# Altium PCB LCD.PcbDoc
Units mm, origin at the board's own origin, x right, y up, seen from the top; angles counter-clockwise.
Board outline 150 x 37 mm, 2 copper layers (Top Layer, Bottom Layer); 62 components, 51 nets, 257 pads, 79 vias.
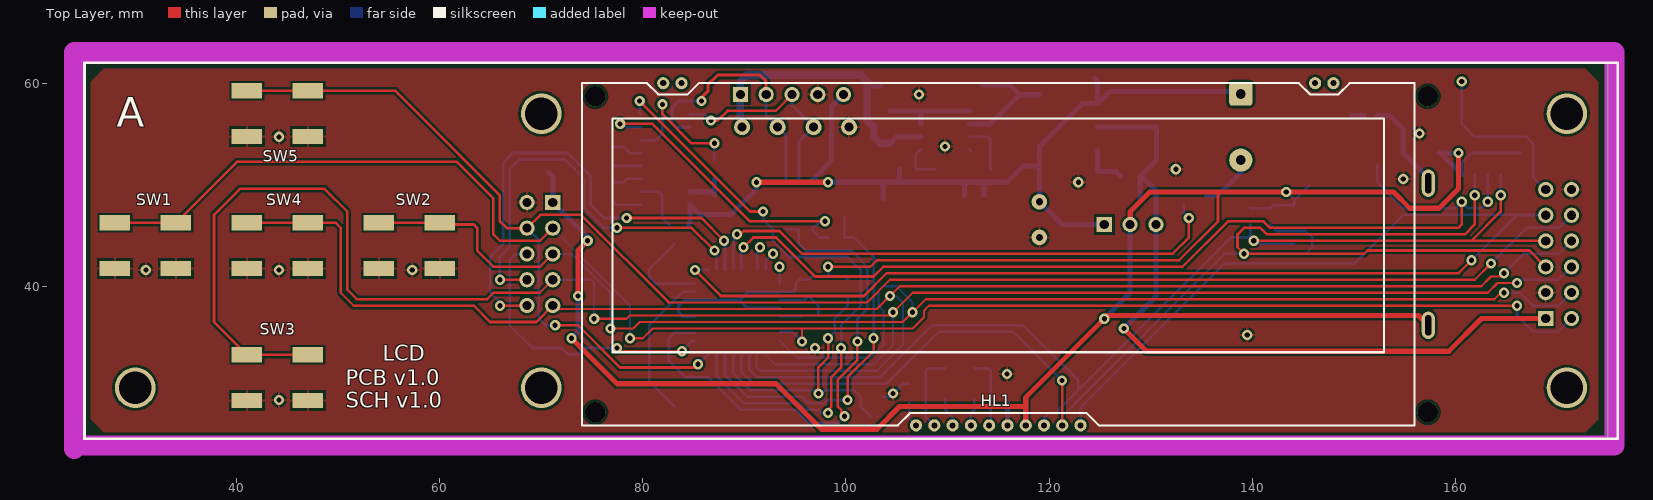
[diagram p0: Top Layer view]
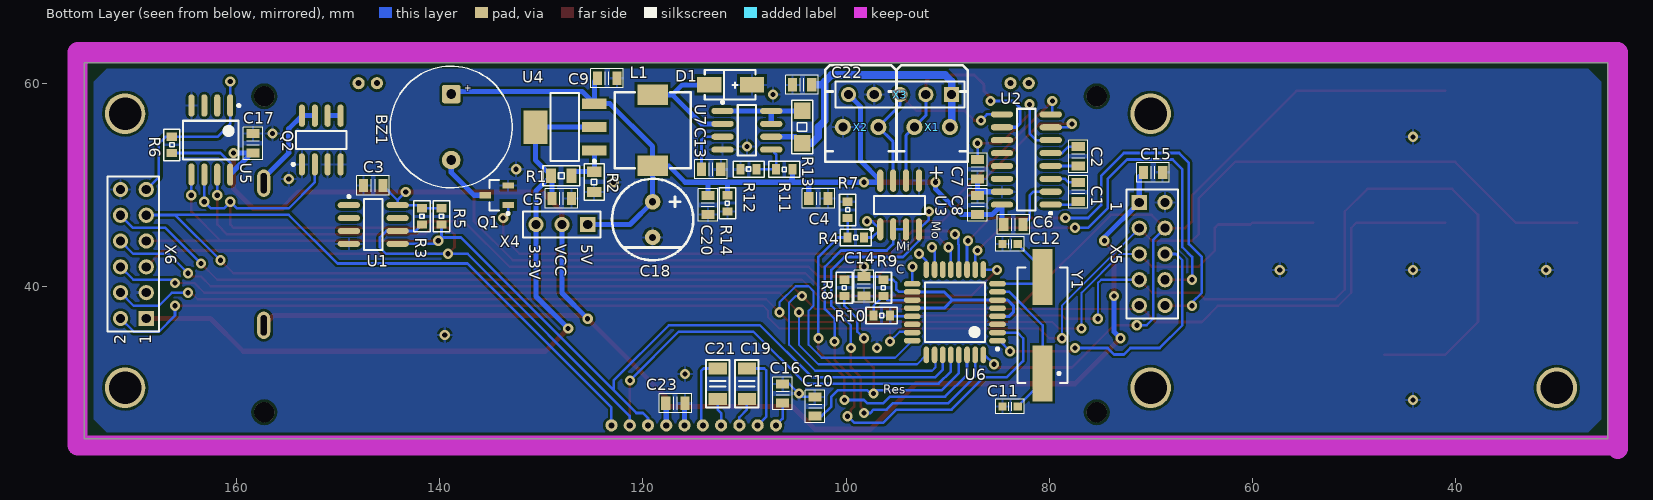
[diagram p1: Bottom Layer view, seen from below]
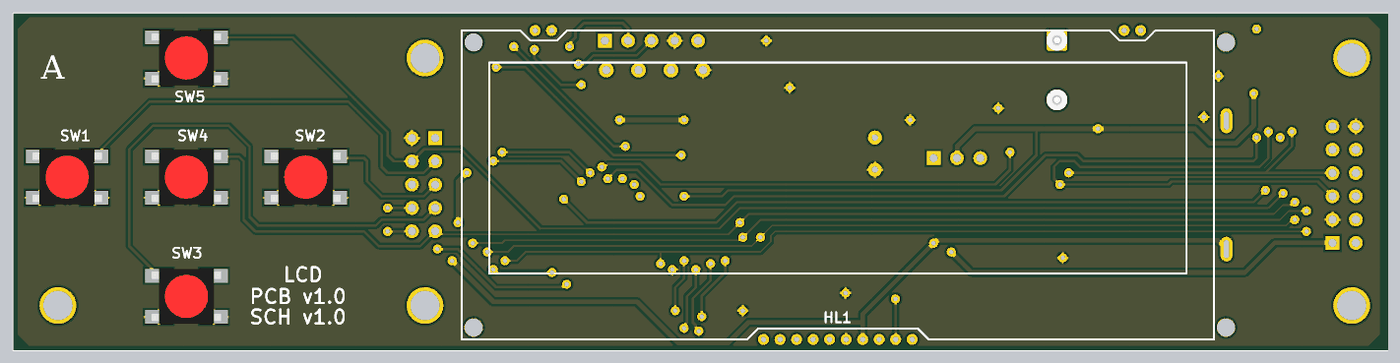
[diagram p2: 3D render of the assembled board from above, using the file's embedded part models]

## Layer stack, top to bottom
Top Solder: solder mask 0.0102, Solder Resist, Dk 3.5
Top Layer: signal copper 0.0356
Dielectric1: dielectric 0.32, FR-4, Dk 4.8
Bottom Layer: signal copper 0.0356
Bottom Solder: solder mask 0.0102, Solder Resist, Dk 3.5

## Board outline
25,25 25,62 175,62 175,25

## Design rules (kind name [scope] priority, off if disabled: settings)
Clearance [All] p1: gap=0.254
PolygonConnect [All] p1: connectstyle=Relief reliefconductorwidth=0.254 reliefentries=4 polygonreliefangle="90 Angle" airgapwidth=0.254
RoutingVias [All] p1: holewidth=0.5 width=1 viastyle="Through Hole" minholewidth=0.4 minwidth=9 maxholewidth=0.7 maxwidth=1.5
SilkToSolderMaskClearance SilkscreenOverComponentPads [IsPad] p1: minsilkscreentomaskgap=0.254 clearancetoexposedcopper=TRUE
SolderMaskExpansion [All] p1: expansion=0.102
Width [All] p1: maxlimit=1 minlimit=0.2 preferedwidth=0.254
29 further rules are at their usual default settings.

## Components (designator, comment, footprint, x,y, rotation, side; value= is the part's Value field where it differs from the comment)
BZ1 "Alternate part: 3100-932" BUZZER_12.0X8.5MM 138.88,55.68 r270 bottom
C1 "0.1u" C_0805 77.12,49.28 r270 bottom
C2 "0.1u" C_0805 77.12,52.8 r270 bottom
C3 "0.1u" C_0805 146.56,49.92 r180 bottom
C4 "1u" C_0805 102.72,48.64 r0 bottom
C5 "1u" C_0805 128,48.64 r0 bottom
C6 "0.1u" C_0805 83.52,46.08 r0 bottom
C7 "0.1u" C_0805 87.04,51.52 r90 bottom
C8 "0.1u" C_0805 87.04,48 r270 bottom
C9 "1u" C_0805 123.52,60.48 r0 bottom
C10 "0.1u" C_0805 103.04,28.16 r270 bottom
C11 "15p" C_0603 83.84,28.16 r180 bottom
C12 "15p" C_0603 83.84,44.16 r180 bottom
C13 "220p" C_0805 113.28,51.52 r0 bottom
C14 "0.1u" C_0805 98.24,40 r90 bottom
C15 "0.1u" C_0805 69.76,51.2 r0 bottom
C16 "0.33u" C_0805 106.24,29.44 r270 bottom
C17 "1u" C_0805 158.4,54.08 r90 bottom
C18 "Component_1" PCBComponent_1 119.04,48.32 r270 bottom
C19 "2.2" C_1206 109.76,30.4 r90 bottom
C20 "1u" C_0805 113.6,48 r90 bottom
C21 "2.2" C_1206 112.64,30.4 r90 bottom
C22 "1u" C_0805 104.32,59.84 r180 bottom
C23 "0.1u" C_0805 116.8,28.48 r0 bottom
D1 "SS14" DO-214AC 111.36,59.84 r180 bottom
HL1 "RX0032" RX0032 115,45 r0 top locked
L1 "330uH" CDRH74 119.04,55.36 r0 bottom
Q1 "PDTC114" SOT-23B_N 134.4,48.96 r0 bottom
Q2 "IRF7319" SO-8 151.68,54.4 r90 bottom
R1 "*" "Resistor 0805" 127.04,50.88 r0 bottom
R2 "240" "Resistor 0805" 124.8,49.28 r90 bottom
R3 "3k" "Resistor 0603" 141.76,46.08 r90 bottom
R4 "3k" "Resistor 0603" 99.84,44.8 r180 bottom
R5 "3k" "Resistor 0603" 139.84,46.08 r90 bottom
R6 "3k" "Resistor 0603" 166.4,54.72 r270 bottom
R7 "3k" "Resistor 0603" 99.84,48.32 r270 bottom
R8 "3k" "Resistor 0603" 100.16,39.04 r90 bottom
R9 "3k" "Resistor 0603" 96.32,39.04 r90 bottom
R10 "3k" "Resistor 0603" 95.68,37.12 r0 bottom
R11 "3k" "Resistor 0603" 105.28,51.52 r0 bottom
R12 "1k" "Resistor 0603" 110.4,51.52 r180 bottom
R13 "3k" "Resistor 1206" 104.32,54.08 r90 bottom
R14 "3k" "Resistor 0603" 111.68,47.36 r90 bottom
SW1 "LTL613" LTL613 31,44 r180 top locked
SW2 "LTL613" LTL613 57,44 r180 top locked
SW3 "LTL613" LTL613 44,31 r180 top locked
SW4 "LTL613" LTL613 44,44 r180 top locked
SW5 "LTL613" LTL613 44,57 r180 top locked
U1 "AT24HC02BN-SP25-B" 8S1_N 146.56,46.08 r180 bottom
U2 "MAX232AESE" NSO16_N 82.24,52.48 r0 bottom
U3 "MAX485CSA" NSO8_N 94.72,48 r90 bottom
U4 "LM1117MPX-3.3" MP04A_N 127.68,55.68 r0 bottom
U5 "ATtiny25-20SU" 8S2_N 162.56,54.4 r270 bottom
U6 "ATmega8A-AU" 32A_N 89.28,37.44 r0 bottom
U7 "MC34063AD" 751-02_N 109.76,55.36 r180 bottom
X1 "DG-2P-35" DG-2P-35 91.52,55.68 r0 bottom
X2 "DG-2P-35" DG-2P-35 98.56,55.68 r0 bottom
X3 "Header 5" HDR1X5 89.6,58.88 r0 bottom
X4 "Header 3" HDR1X3 125.44,46.08 r0 bottom
X5 "Header 5X2" HDR2X5 71.12,48.26 r270 bottom
X6 "Header 6X2" HDR2X6 168.91,36.83 r90 bottom
Y1 "HC49/4H_SMX" HC49/4H_SMX 80.64,36.16 r90 bottom

## Footprints (in the part's own frame and the unit in brackets; to place one, negate y for a bottom-side part, rotate by r counter-clockwise, add the part's x,y. Pads: shape width x height; smd on the part's side, far side on the other; paste and mask are expansions set on the pad)
8S1_N [mm] "SOIC, 8-Leads, Body 4.9x3.9mm, Pitch 1.27mm, IPC Medium Density"
  oval 2.2x0.6 smd: 1(-2.4,1.905) 2(-2.4,0.635) 3(-2.4,-0.635) 4(-2.4,-1.905) 5(2.4,-1.905) 6(2.4,-0.635) 7(2.4,0.635) 8(2.4,1.905)
  silkscreen extent -2.53,-2.5 0.9,2.88, body extent -2,-2.5 2,2.5, height 1.75
8S2_N [mm] "SOP, 8-Leads, Body 5.3x5.3mm, Pitch 1.27mm, IPC Medium Density"
  oval 2.2x0.6 smd: 1(-3.4,1.905) 2(-3.4,0.635) 3(-3.4,-0.635) 4(-3.4,-1.905) 5(3.4,-1.905) 6(3.4,-0.635) 7(3.4,0.635) 8(3.4,1.905)
  silkscreen extent -3.52,-2.75 1.9,2.88, body extent -2.73,-2.75 2.73,2.75, height 2.16
32A_N [mm] "Thin QFP, 32-Leads, Body 7x7mm, Pitch 0.8mm, IPC Medium Density"
  oval 1.65x0.55 smd: 1(-4.2,2.8) 2(-4.2,2) 3(-4.2,1.2) 4(-4.2,0.4) 5(-4.2,-0.4) 6(-4.2,-1.2) 7(-4.2,-2) 8(-4.2,-2.8) 17(4.2,-2.8) 18(4.2,-2) 19(4.2,-1.2) 20(4.2,-0.4) 21(4.2,0.4) 22(4.2,1.2) 23(4.2,2) 24(4.2,2.8)
  oval 0.55x1.65 smd: 9(-2.8,-4.2) 10(-2,-4.2) 11(-1.2,-4.2) 12(-0.4,-4.2) 13(0.4,-4.2) 14(1.2,-4.2) 15(2,-4.2) 16(2.8,-4.2) 25(2.8,4.2) 26(2,4.2) 27(1.2,4.2) 28(0.4,4.2) 29(-0.4,4.2) 30(-1.2,4.2) 31(-2,4.2) 32(-2.8,4.2)
  silkscreen extent -4.32,-2.95 2.95,3.75, body extent -3.5,-3.5 3.5,3.5, height 1.2
751-02_N [mm] "SOIC, 8-Leads, Body 4.9x3.9mm, Pitch 1.27mm, IPC Medium Density"
  oval 2.2x0.6 smd: 1(-2.4,1.905) 2(-2.4,0.635) 3(-2.4,-0.635) 4(-2.4,-1.905) 5(2.4,-1.905) 6(2.4,-0.635) 7(2.4,0.635) 8(2.4,1.905)
  silkscreen extent -2.53,-2.5 0.9,2.88, body extent -1.95,-2.45 1.95,2.45, height 1.75
BUZZER_12.0X8.5MM [mil]
  round 20 on Mech15: 0(0,0)
  rrect25% 72x72 / inner rrect25% 72x72 / far side rrect25% 90x90 hole 38: 1(-127.95,0)
  round 72 / inner round 72 / far side round 90 hole 38: 2(127.95,0)
  silkscreen extent -236,-236 236,236, body extent -246,-246 246,246, height 354
C_0603 [mm] "Chip Capacitor; Body 1.6 x 0.8 mm (LxW typ)"
  rect 0.8x0.8 smd: 1(-0.75,0) 2(0.75,0)
  silkscreen extent -1.4,-0.7 1.4,0.7, body extent -0.8,-0.4 0.8,0.4, height 0.3
C_0805 [mm] "Capacitor Pattern"
  rect 0.9x1.3 smd: 1(-0.95,0) 2(0.95,0)
  silkscreen extent -1.6,-0.95 1.6,0.95, body extent -1,-0.63 1,0.62, height 0.6
C_1206 [mm]
  rect 1.15x1.8 smd: 1(-1.5,0) 2(1.5,0)
  silkscreen extent -2.32,-1.15 2.33,1.15, body extent -1.6,-0.8 1.6,0.8, height 1
CDRH74 [mm]
  rect 3x2 smd: 1(0,3.5) 2(0,-3.5)
  silkscreen extent -3.75,-3.75 3.75,3.75, body extent -3.5,-3.52 3.5,3.53, height 4.5
DG-2P-35 [mm]
  round 1.6 hole 0.9: 1(-1.75,0) 2(1.75,0)
  silkscreen extent -3.5,-6.1 3.5,3.4
DO-214AC [mm]
  rect 2.4x1.55 smd: 1(2.1,0) 2(-2.1,0)
  silkscreen extent -2.55,-1.45 2.45,1.45, body extent -2.6,-1.3 2.6,1.3, height 2.39
HC49/4H_SMX [mm] "Surface Mount Quartz Crystal; Body 13.4 (inc. leads) x 4.9 mm (LxW max)"
  rect 5.5x2 smd: 1(-4.75,0) 2(4.75,0)
  silkscreen extent -5.7,-2.45 5.7,2.45
HDR1X3 [mm] "Connector; Header; 3 Position"
  rect 1.5x1.5 hole 0.9: 1(0,0)
  round 1.5 hole 0.9: 2(2.54,0) 3(5.08,0)
  silkscreen extent -1.27,-1.27 6.35,1.27
HDR1X5 [mm] "Connector; Header; 5 Position"
  rect 1.5x1.5 hole 0.9: 1(0,0)
  round 1.5 hole 0.9: 2(2.54,0) 3(5.08,0) 4(7.62,0) 5(10.16,0)
  silkscreen extent -1.27,-1.27 11.43,1.27
HDR2X5 [mm] "Connector; Header; 5x2 Position"
  rect 1.5x1.5 hole 0.9: 1(0,0)
  round 1.5 hole 0.9: 2(0,2.54) 3(2.54,0) 4(2.54,2.54) 5(5.08,0) 6(5.08,2.54) 7(7.62,0) 8(7.62,2.54) 9(10.16,0) 10(10.16,2.54)
  silkscreen extent -1.27,-1.27 11.43,3.81
HDR2X6 [mm] "Connector; Header; 6x2 Position"
  rect 1.5x1.5 hole 0.9: 1(0,0)
  round 1.5 hole 0.9: 2(0,2.54) 3(2.54,0) 4(2.54,2.54) 5(5.08,0) 6(5.08,2.54) 7(7.62,0) 8(7.62,2.54) 9(10.16,0) 10(10.16,2.54) 11(12.7,0) 12(12.7,2.54)
  silkscreen extent -1.27,-1.27 13.97,3.81
LTL613 [mm]
  rect 3x1.5 smd: 0(-3,-2.25) 0(3,-2.25) 1(-3,2.25) 1(3,2.25)
  body extent -4.04,-3 4.04,3, height 5
MP04A_N [mm] "SOT223, 4-Leads, Body 6.5x3.5mm, Pitch 2.3mm, Lead Span 7mm, IPC Medium Density"
  rect 2.4x1 smd: 1(-2.9,2.3) 2(-2.9,0) 3(-2.9,-2.3)
  rect 2.4x3.3 smd: 4(2.9,0)
  silkscreen extent -3.02,-3.35 1.4,3.47, body extent -1.85,-3.35 1.85,3.35, height 1.8
NSO8_N [mm] "SOIC, 8-Leads, Body 4.9x3.9mm, Pitch 1.27mm, IPC Medium Density"
  oval 2.2x0.6 smd: 1(-2.4,1.905) 2(-2.4,0.635) 3(-2.4,-0.635) 4(-2.4,-1.905) 5(2.4,-1.905) 6(2.4,-0.635) 7(2.4,0.635) 8(2.4,1.905)
  silkscreen extent -2.52,-2.5 0.9,2.88, body extent -2,-2.5 2,2.5, height 1.75
NSO16_N [mm] "SOIC, 16-Leads, Body 9.9x3.9mm, Pitch 1.27mm, IPC Medium Density"
  oval 2.2x0.6 smd: 1(-2.4,4.445) 2(-2.4,3.175) 3(-2.4,1.905) 4(-2.4,0.635) 5(-2.4,-0.635) 6(-2.4,-1.905) 7(-2.4,-3.175) 8(-2.4,-4.445) 9(2.4,-4.445) 10(2.4,-3.175) 11(2.4,-1.905) 12(2.4,-0.635) 13(2.4,0.635) 14(2.4,1.905) 15(2.4,3.175) 16(2.4,4.445)
  silkscreen extent -2.52,-5 0.9,5.42, body extent -2,-5 2,5, height 1.75
PCBComponent_1 [mil]
  round 60 hole 27.56: 1(0,0) 2(137.8,0)
  silkscreen extent -89,-158 227,158
"Resistor 0603" [mm]
  rect 0.8x1 smd: 1(0,0) 2(1.6,0)
  silkscreen extent -0.72,-0.8 2.35,0.8, body extent -0.03,-0.45 1.63,0.45, height 0.46
"Resistor 0805" [mm]
  rect 1x1.4 smd: 1(0,0) 2(2,0)
  silkscreen extent -0.8,-1 2.8,1, body extent -0.03,-0.65 2.02,0.65, height 0.41
"Resistor 1206" [mm]
  rect 1.6x1.6 smd: 1(0,0) 2(3.2,0)
  silkscreen extent -1.02,-1.02 4.23,1.02, body extent -0.03,-0.79 3.4,0.8, height 0.5
RX0032 [mm]
  round 1.2 hole 0.6: 1(-8.1,-18.7) 2(-6.3,-18.7) 3(-4.5,-18.7) 4(-2.7,-18.7) 5(-0.9,-18.7) 6(0.9,-18.7) 7(2.7,-18.7) 8(4.5,-18.7) 9(6.3,-18.7) 10(8.1,-18.7) 11(-33,15) 12(-31.2,15) 13(31.2,15) 14(33,15)
  oval 1.3x2.7 hole 0.6 slot 2 at 90 deg: 15(42.35,5.15) 16(42.35,-8.85)
  round 2 hole 2: M(-39.7,-17.4) M(42.3,-17.4) M(42.3,13.7)
  round 2 hole 2 unplated: M(-39.7,13.7)
  silkscreen extent -41,-18.7 41,15
SO-8 [mm] "SOIC, 8-Leads, Body 4.9x3.9mm, Pitch 1.27mm, IPC Medium Density"
  oval 2.2x0.6 smd: 1(-2.4,1.905) 2(-2.4,0.635) 3(-2.4,-0.635) 4(-2.4,-1.905) 5(2.4,-1.905) 6(2.4,-0.635) 7(2.4,0.635) 8(2.4,1.905)
  silkscreen extent -2.52,-2.5 0.9,2.88, body extent -3.17,-2.51 3.17,2.49, height 1.88
SOT-23B_N [mm] "SOT23, 3-Leads, Body 2.9x1.3mm, Pitch 0.95mm, Lead Span 2.4mm, IPC Medium Density"
  rect 1.15x0.6 smd: 1(-1.125,0.95) 2(-1.125,-0.95) 3(1.125,0)
  silkscreen extent -1.25,-1.5 0.7,1.92, body extent -0.7,-1.5 0.7,1.5, height 1.14

## Part data
BZ1: library part BZ_12x8.5x6.5_2kHz, "Speaker, Magnetic Transducer"
C1 C2 C3 C4 C5 C6 C7 C8 C9 C10 C13 C14 C15 C16 C17 C20 C22 C23: library part C0805, "Capacitor"
C11 C12: library part C0603, "Capacitor"
C19 C21: library part C1206, "Capacitor"
D1: library part DS_DO-214, "Schottky Diode"
L1: library part L_CDRH74, "Inductor"
Q1: library part QNPN, "NPN Bipolar Transistor"
Q2: "HEXFET Power MOSFET"
R1 R2 R3 R4 R5 R6 R7 R8 R9 R10 R11 R12 R13 R14: library part Resistor
SW1 SW2 SW3 SW4 SW5: library part Button_tact, "Tact button switch"
U1: "2Kbit (256 x 8), 2-wire Bus Serial Automotive EEPROM with 1/2 memory Write Protect, 2.5V, 8-Pin SOIC, Bulk"
U2: "+5V-Powered, Multichannel RS-232 Driver/Receiver"
U3: "Low-Power, Slew-Rate-Limited RS-485/RS-422 Transceiver"
U4: "800mA Low-Dropout Linear Regulator, 4-pin SOT-223"
U5: "8-bit AVR Microcontroller, 2.7-5.5V, 2KB Flash, 128 Bytes EEPROM, 128 Bytes SRAM, 8-pin SOP, Industrial Grade (-40°C to 85°C), Pb-Free"
U6: "8-bit AVR Microcontroller, 8KB Flash, 512 Bytes EEPROM, 1KB SRAM, 32-pin TQFP, Industrial Grade (-40°C to 85°C)"
U7: "DC-to-DC Converter Control Circuit"
X3: "Header, 5-Pin"
X4: "Header, 3-Pin"
X5: "Header, 5-Pin, Dual row"
X6: "Header, 6-Pin, Dual row"
Y1: "Surface Mount Quartz Crystal"

## Free pads (board coordinates)
  round 4 hole 3.2: 1(30,30) 1(70,30) 1(70,57) 1(171,57) 2(171,30)

## Via types
v1: diameter 1, hole 0.5, Top Layer to Bottom Layer, 79 vias

## Nets (pads, with @x,y where several pads share a name; then routed paths per layer and width w, separated by ;. In a path a pad name is that pad's centre, name@x,y a point inside that pad or via, vN(x,y) a via of type N, cw(c..) or ccw(c..) an arc to the next point about the centre after c; other vN are vias at no path point)
A: U2.10 U3.6 X1.2 X3.2 | length 25.5
  Top Layer w0.305: v1(85.76,58.24) 85.76,58.56 86.4,59.2 86.4,59.84 87.36,60.8 91.52,60.8 92.14,60.18 X3.2
  Bottom Layer w0.305: U2.10 83.225,55.655 82.88,56 82.88,57.6 83.52,58.24 v1(85.76,58.24) ; X3.2 92.14,56.81 X1.2 94.085,54.865 U3.6
B: U2.9 U3.7 X2.1 X3.3 | length 21.3
  Top Layer w0.254: v1(86.72,56.32) 87.36,56.32 88.32,57.28 93.08,57.28 X3.3
  Bottom Layer w0.254: U2.9 86.115,56.925 v1(86.72,56.32)
  Bottom Layer w0.305: X3.3 94.68,57.81 X2.1 95.355,54.225 U3.7
BT-0: SW1.0 U6.23 X5.3 X6.2 | length 165.9
  Top Layer w0.203: v1(78.72,34.88) 80,34.88 80.96,35.84 95.68,35.84 ; v1(95.68,34.56) 95.68,35.84 ; v1(166.08,38.08) 108.16,38.08 107.68,37.6 107.68,36.96 106.56,35.84 95.68,35.84
  Top Layer w0.254: SW1.0@28,46.25 34,46.25 40,52.25 61.67,52.25 65.28,48.64 65.28,45.12 65.92,44.48 69.88,44.48 X5.3
  Bottom Layer w0.203: X5.3 78.72,38.12 v1(78.72,34.88) ; U6.23 93.56,35.52 94.72,35.52 v1(95.68,34.56)
  Bottom Layer w0.254: v1(166.08,38.08) 166.08,37.12 167.68,35.52 170.14,35.52 X6.2
BT-1: SW2.0 U6.24 X5.5 X6.4 | length 150.8
  Top Layer w0.203: v1(76.8,35.84) 79.04,35.84 79.68,36.48 105.6,36.48 107.84,38.72 163.84,38.72 164.48,39.36 v1(164.8,39.36)
  Top Layer w0.254: SW2.0@54,46.25 60,46.25 60.17,46.08 63.36,46.08 63.68,45.76 63.68,43.52 65.28,41.92 69.86,41.92 X5.5
  Bottom Layer w0.203: X5.5 72.987,43.18 76.8,39.367 v1(76.8,35.84) ; U6.24 95.16,32.96 102.4,32.96 103.68,34.24 103.68,37.605 103.203,38.083 103.203,39.523 103.68,40 104.96,40 106.56,38.4 v1(106.56,37.44)
  Bottom Layer w0.254: v1(164.8,39.36) 166.4,39.36 167.68,38.08 170.16,38.08 X6.4
BT-2: SW3.0 U6.25 X5.7 X6.6 | length 188.4
  Top Layer w0.203: v1(75.2,36.8) 78.4,36.8 78.72,37.12 104.32,37.12 v1(104.64,37.44) 106.56,39.36 163.2,39.36 164.16,40.32 v1(166.08,40.32)
  Top Layer w0.254: SW3.0@47,33.25 41,33.25 37.76,36.49 37.76,47.04 40.32,49.6 48.64,49.6 50.88,47.36 50.88,39.68 51.84,38.72 64.64,38.72 65.28,39.36 69.84,39.36 X5.7
  Bottom Layer w0.203: X5.7 74.88,40.64 75.2,40.32 v1(75.2,36.8) ; U6.25 93,32.32 102.72,32.32 104.64,34.24 v1(104.64,37.44)
  Bottom Layer w0.254: v1(166.08,40.32) 166.4,40.64 170.18,40.64 X6.6
BT-3: SW4.0 U6.26 X5.9 X6.8 | length 164.4
  Top Layer w0.203: X5.9 71.46,37.76 103.04,37.76 v1(104.32,39.04) 105.28,40 162.56,40 163.52,40.96 164.48,40.96 v1(164.8,41.28)
  Top Layer w0.254: SW4.0@41,46.25 47,46.25 49.75,46.25 50.24,45.76 50.24,39.36 51.52,38.08 63.36,38.08 64.96,36.48 69.5,36.48 X5.9
  Bottom Layer w0.203: U6.26 91.2,33.16 91.2,32 91.52,31.68 103.04,31.68 105.6,34.24 105.6,38.4 104.96,39.04 v1(104.32,39.04)
  Bottom Layer w0.254: v1(164.8,41.28) 166.72,43.2 170.2,43.2 X6.8
BT-4: SW5.0 U6.32 X5.4 X6.10 | length 173.8
  Top Layer w0.203: 82.56,38.4 102.08,38.4 104.32,40.64 161.92,40.64 v1(163.52,42.24)
  Top Layer w0.254: SW5.0@41,59.25 47,59.25 55.63,59.25 65.92,48.96 65.92,46.4 66.6,45.72 X5.4 69.9,47.04 73.92,47.04 82.56,38.4 ; v1(71.36,36.16) 73.6,36.16 77.76,32 85.12,32 v1(85.44,32.32)
  Bottom Layer w0.254: X5.4 69.76,44.54 69.76,36.8 70.4,36.16 v1(71.36,36.16) ; v1(85.44,32.32) 86.4,33.28 U6.32@86.44,33.28 ; v1(163.52,42.24) 167.04,45.76 170.22,45.76 X6.10
BT-5: U6.1 X5.6 | length 28.6
  Top Layer w0.254: v1(77.44,33.92) 77.76,33.6 v1(83.84,33.6)
  Bottom Layer w0.254: X5.6 67.5,43.18 66.88,42.56 66.88,36.16 69.12,33.92 72,33.92 72.64,33.28 73.6,33.28 74.24,33.92 v1(77.44,33.92) ; v1(83.84,33.6) 84.88,34.64 U6.1
BT-6: U6.10 X5.8 | length 41.9
  Top Layer w0.254: v1(65.92,40.64) X5.8 ; v1(77.44,45.76) 84.8,45.76 v1(87.04,43.52)
  Bottom Layer w0.254: v1(65.92,40.64) 65.92,42.88 66.88,43.84 66.88,51.52 67.84,52.48 72.32,52.48 74.24,50.56 74.24,47.68 76.16,45.76 v1(77.44,45.76) ; v1(87.04,43.52) 87.28,43.28 U6.10
BT-7: U6.11 X5.10 | length 48
  Top Layer w0.254: v1(65.92,38.08) 65.94,38.1 X5.10 ; v1(78.4,46.72) 85.76,46.72 v1(88,44.48)
  Bottom Layer w0.254: v1(65.92,38.08) 65.92,38.4 64.96,39.36 64.96,42.88 66.24,44.16 66.24,52.16 67.2,53.12 72.64,53.12 74.88,50.88 74.88,48 76.16,46.72 v1(78.4,46.72) ; v1(88,44.48) 88.08,44.4 U6.11
BUZ: Q1.1 U6.12 | length 53.3
  Top Layer w0.254: v1(89.28,45.12) 89.6,45.12 89.92,45.44 93.44,45.44 95.68,43.2 132.16,43.2 133.76,44.8 v1(133.76,46.72)
  Bottom Layer w0.254: U6.12 88.88,44.08 88.96,44.16 88.96,44.8 v1(89.28,45.12) ; Q1.1 133.275,47.205 v1(133.76,46.72)
GND: C3.1 C4.1 C5.1 C7.1 C8.1 C9.1 C10.1 C11.1 C12.1 C13.1 C14.1 C15.1 C16.1 C17.2 C18.2 C20.1 C22.1 C23.1 D1.1 HL1.6 Q1.2 Q2.1 Q2.3 Q2.4 R2.1 R7.1 R10.1 R12.1 R14.1 SW1.1 SW2.1 SW3.1 SW4.1 SW5.1 U1.4 U2.15 U3.5 U5.4 U6.3 U6.5 U6.21 U7.4 X2.2 X3.4 X5.2 X6.3 X6.12 | length 11.8
  Bottom Layer w0.254: U6.21 R10.1@95.6,37.04 ; C10.1@103.68,29.11 103.69,29.12 104.32,29.12 105.59,30.39 C16.1 ; U7.4 U7.4@112.33,53.285
  Bottom Layer w0.5: U2.15 86.685,49.305 C8.1 C7.1
  Bottom Layer w0.508: C23.1 115.9,28.43 HL1.6
  other v1: 44.16,28.8 104.64,29.44 115.84,31.36 96.96,33.92 139.52,35.2 31.04,41.6 44.16,41.6 57.28,41.6 122.88,50.24 154.88,50.56 132.48,51.52 109.76,53.76 44.16,54.72 156.48,55.04 107.2,58.88
LED: HL1.15 Q2.7 Q2.8 | length 9.5
  Bottom Layer w0.508: Q2.7 Q2.8 154.88,55.505 154.88,53.12 157.35,50.65 HL1.15
LOAD: Q2.2 U5.6 U6.13 | length 97.1
  Top Layer w0.254: v1(89.92,43.84) 90.88,44.8 93.12,44.8 96.96,40.96 102.72,40.96 103.68,41.92 133.12,41.92 137.6,46.4 141.12,46.4 141.76,45.76 160.32,45.76 160.64,46.08 v1(160.64,48.32)
  Bottom Layer w0.254: U6.13 89.68,43.6 v1(89.92,43.84) ; Q2.2 152.315,50.245 154.88,47.68 160,47.68 v1(160.64,48.32) 161.28,47.68 162.56,47.68 v1(163.2,48.32) U5.6@163.2,50.995
MISO: U6.16 | length 1.9
  Bottom Layer w0.254: U6.16 92.08,42.48 v1(92.8,43.2)
MOSI: U6.15 | length 2.3
  Bottom Layer w0.254: U6.15 91.28,43.6 v1(91.52,43.84)
NetBZ1_2: BZ1.2 Q1.3 | length 5.5
  Bottom Layer w0.5: Q1.3 136.64,48.96 138.88,51.2 BZ1.2
NetC1_1: C1.1 U2.3 | length 2.9
  Bottom Layer w0.254: C1.1 78.07,50.23 78.415,50.575 U2.3
NetC1_2: C1.2 U2.1 | length 2.8
  Bottom Layer w0.254: C1.2 77.415,48.035 U2.1
NetC2_1: C2.1 U2.5 | length 3
  Bottom Layer w0.254: C2.1 78.09,53.75 78.725,53.115 U2.5
NetC2_2: C2.2 U2.4 | length 2.7
  Bottom Layer w0.254: C2.2 77.125,51.845 U2.4
NetC6_1: C6.1 U2.2 | length 5.4
  Bottom Layer w0.254: U2.2 81.575,49.305 81.92,48.96 81.92,46.73 C6.1
NetC7_2: C7.2 U2.6 | length 14.1
  Top Layer w0.254: v1(81.92,57.92) 81.92,56.96 84.8,54.08 v1(87.04,54.08)
  Bottom Layer w0.254: U2.6 81.265,54.385 81.92,55.04 v1(81.92,57.92) ; C7.2 v1(87.04,54.08)
NetC11_2: C11.2 U6.7 Y1.1 | length 14.8
  Bottom Layer w0.254: C11.2 80.64,30.61 Y1.1 80.64,36.16 83.92,39.44 U6.7
NetC12_2: C12.2 U6.8 Y1.2 | length 9
  Bottom Layer w0.254: C12.2 80.64,41.71 Y1.2 81.31,40.24 U6.8
NetC13_2: C13.2 U7.3 | length 5.1
  Bottom Layer w0.254: U7.3 113.915,54.725 114.23,54.41 C13.2
NetC16_2: C16.2 HL1.1 | length 2.5
  Bottom Layer w0.254: C16.2 106.24,26.96 HL1.1
NetC19_1: C19.1 HL1.3 | length 2.9
  Bottom Layer w0.254: C19.1 109.76,27.84 110.5,27.1 HL1.3
NetC19_2: C19.2 HL1.2 | length 7.7
  Bottom Layer w0.254: HL1.2 107.84,27.16 107.84,31.68 108.06,31.9 C19.2
NetC21_1: C21.1 HL1.4 | length 2.7
  Bottom Layer w0.254: HL1.4 112.3,27.5 112.64,27.84 C21.1
NetC21_2: C21.2 HL1.5 | length 7.1
  Bottom Layer w0.254: C21.2 114.02,31.9 114.24,31.68 114.24,26.44 HL1.5
NetD1_2: D1.2 L1.2 U7.2 | length 12.1
  Bottom Layer w0.5: U7.2 114.235,55.995 117.1,58.86 ; D1.2 116.12,59.84 117.1,58.86 ; L1.2 117.1,58.86
NetQ2_5: Q2.5 Q2.6 | length 1.3
  Bottom Layer w0.508: Q2.5 Q2.6
NetR1_1: R1.1 R2.2 U4.1 | length 4.5
  Bottom Layer w0.5: U4.1 124.78,51.3 126.62,51.3 R1.1
NetR4_2: R4.2 U2.7 U3.1 | length 29.9
  Top Layer w0.254: v1(77.76,56) 80.96,56 90.56,46.4 v1(97.92,46.4)
  Bottom Layer w0.254: v1(77.76,56) 78.105,55.655 U2.7 ; v1(97.92,46.4) 97.425,46.4 U3.1 97.425,44.8 R4.2
NetR9_1: R9.1 R10.2 U6.19 | length 5.3
  Bottom Layer w0.254: U6.19 95.92,38.64 R9.1 97.28,38.08 R10.2
NetR11_2: R11.2 R12.2 U7.5 | length 4.1
  Bottom Layer w0.254: U7.5 106.88,52.975 R11.2 R12.2
NetR13_2: R13.2 U7.1 U7.7 U7.8 | length 9.1
  Bottom Layer w0.508: R13.2 104.335,57.265 U7.8 ; U7.7 U7.8 ; U7.1 U7.8
RES: C10.2 R8.1 U6.29 | length 28.7
  Top Layer w0.254: v1(97.28,29.44) 97.28,32 98.24,32.96 v1(98.24,34.88)
  Bottom Layer w0.254: U6.29 88.88,31.44 90.56,29.76 96.96,29.76 v1(97.28,29.44) 97.6,29.44 97.92,29.76 100.8,29.76 101.44,29.12 101.44,28.16 C10.2@102.39,27.21 ; v1(98.24,34.88) 98.88,35.52 98.88,36.8 100.16,38.08 R8.1 ; C10.2@103.04,27.2 C10.2
RES-LCD: HL1.10 U6.9 X6.9 | length 145
  Top Layer w0.254: v1(85.12,41.6) 87.68,39.04 101.76,39.04 104,41.28 160.32,41.28 v1(161.6,42.56)
  Bottom Layer w0.254: v1(85.12,41.6) 85.16,41.64 U6.9 ; HL1.10 123.1,28.06 137.28,42.24 150.08,42.24 154.88,47.04 168.86,47.04 X6.9 166.03,46.99 v1(161.6,42.56)
RES-TINY: R6.1 U5.1 X6.11 | length 17.3
  Bottom Layer w0.254: v1(160.64,60.16) 160.64,57.615 U5.1@160.655,57.63 ; U5.1 U5.1@160.655,57.63 ; X6.11 167.68,50.76 167.68,54.08 167.04,54.72 R6.1 161.92,54.72 160.655,55.985 U5.1@160.655,57.63
RI-DI: U3.2 U3.3 U6.2 | length 51.6
  Top Layer w0.254: v1(99.84,27.2) 99.52,27.52 99.52,27.84 99.2,28.16 99.2,30.798 101.12,32.718 v1(101.12,34.56)
  Bottom Layer w0.254: U6.2 83.12,35.44 82.56,34.88 82.56,32.64 84.16,31.04 86.4,31.04 89.6,27.84 95.04,27.84 96.32,26.56 99.2,26.56 v1(99.84,27.2) ; U3.3 U3.2 95.355,44.165 96,43.52 100.48,43.52 102.08,41.92 102.08,37.76 101.12,36.8 v1(101.12,34.56)
RXD: R4.1 R7.2 U6.30 | length 36.1
  Top Layer w0.254: v1(100.16,28.8) 100.16,31.04 102.72,33.6 v1(102.72,34.88)
  Bottom Layer w0.254: U6.30 88.08,31.28 90.24,29.12 95.68,29.12 96.32,28.48 97.92,28.48 98.24,28.8 v1(100.16,28.8) ; R7.2 R4.1 100.8,44.8 102.72,42.88 v1(102.72,34.88)
SCK: U6.17 | length 1.7
  Bottom Layer w0.254: v1(93.44,41.92) 93.48,41.88 U6.17
SCL: HL1.9 R3.1 U1.6 U5.7 U6.28 X6.5 | length 142.2
  Top Layer w0.254: v1(121.28,30.72) 121.3,30.7 HL1.9 ; v1(161.92,48.96) 161.92,46.08 160.96,45.12 141.44,45.12 140.8,45.76 139.2,45.76 138.56,45.12 138.56,43.84 v1(139.2,43.2) 151.04,43.2 151.36,43.52 167.3,43.52 X6.5
  Bottom Layer w0.254: U6.28 89.68,31.6 90.88,30.4 104,30.4 109.12,35.52 116.48,35.52 v1(121.28,30.72) ; HL1.9 121.3,27.22 137.28,43.2 v1(139.2,43.2) 145.28,43.2 145.92,43.84 145.92,44.8 145.275,45.445 U1.6 142.395,45.445 R3.1 ; v1(161.92,48.96) U5.7@161.92,50.995
SDA: HL1.8 R5.1 U1.5 U5.5 U6.27 X6.7 | length 110.3
  Top Layer w0.254: v1(140.16,44.48) 161.6,44.48 ; v1(164.48,48.96) 164.48,47.36 161.6,44.48 ; X6.7 168.88,44.48 161.6,44.48
  Bottom Layer w0.254: U6.27 90.48,31.76 91.2,31.04 103.36,31.04 108.48,36.16 117.44,36.16 122.88,30.72 122.88,29.76 ; HL1.8 119.5,27.02 120,27.52 120.64,27.52 122.88,29.76 ; R5.1 v1@139.84,44.8 ; U1.5 140.465,44.175 v1@139.84,44.8 ; v1(164.48,48.96) U5.5@164.48,50.985 ; 122.88,29.76 137.92,44.8 v1@139.84,44.8
TXD: U2.8 U3.4 U6.31 | length 61.1
  Top Layer w0.254: v1(79.68,58.24) 90.56,47.36 v1(91.84,47.36) ; v1(98.24,27.52) 98.24,27.84 98.56,28.16 98.56,31.04 99.52,32 v1(99.52,33.92)
  Bottom Layer w0.254: v1(79.68,58.24) 79.68,57.085 U2.8 ; U6.31 87.28,31.12 89.92,28.48 95.36,28.48 96,27.84 97.28,27.84 97.6,27.52 v1(98.24,27.52) ; v1(91.84,47.36) 91.84,46.575 92.8,45.615 92.8,44.48 94.4,42.88 100.16,42.88 101.44,41.6 101.44,38.08 99.52,36.16 v1(99.52,33.92)
VCC: C3.2 C14.2 C15.2 C17.1 C23.2 HL1.7 HL1.16 R3.2 R5.2 R6.2 R8.2 R9.2 U1.8 U5.8 U6.4 U6.6 U6.18 U6.20 X4.2 X5.1 | length 255.5
  Top Layer w0.254: v1(98.24,41.92) 102.4,41.92 103.04,42.56 132.8,42.56 136.64,46.4 136.64,49.28
  Top Layer w0.508: v1(72.96,34.88) 77.44,30.4 93.12,30.4 97.6,25.92 103.04,25.92 105.28,28.16 117.7,28.16 ; v1(73.6,39.04) 73.6,43.52 v1(74.56,44.48) ; HL1.7 117.7,28.16 ; X4.2 128,46.1 128,47.36 129.92,49.28 136.64,49.28 v1(143.36,49.28) 153.92,49.28 155.52,47.68 158.4,47.68 160.32,49.6 v1(160.32,53.12) ; HL1.16 156.38,37.12 125.76,37.12 v1(125.44,36.8) 117.7,29.06 117.7,28.16
  Bottom Layer w0.254: U6.18 94.8,39.44 95.04,39.68 95.04,40.32 95.36,40.64 R9.2 96.63,40.95 C14.2 ; v1(98.24,41.92) C14.2 ; R8.2 99.85,40.95 C14.2 ; R5.2 R3.2 142.065,47.985 U1.8 144.16,48.47 ; v1(143.36,49.28) 144.16,48.48 144.16,48.47 ; C3.2 144.16,48.47 ; U5.8 160.655,52.175 161.6,53.12 R6.2
  Bottom Layer w0.305: U6.4 83.92,37.04 83.52,37.44 83.52,38.08 84.08,38.64 U6.6 89.52,38.64 ; U6.20 90.32,37.84 89.52,38.64 ; U6.18 90.32,39.44 89.52,38.64
  Bottom Layer w0.508: C15.2 71.12,50.79 X5.1 74.56,44.82 v1(74.56,44.48) ; v1(72.96,34.88) 73.6,35.52 v1(73.6,39.04) ; HL1.7 117.7,28.43 C23.2 ; v1(125.44,36.8) 127.98,39.34 X4.2 ; C17.1 C17.1@158.525,53.13 ; v1(160.32,53.12) 160.31,53.13 C17.1@158.525,53.13 ; U5.8 C17.1@158.525,53.13
VCC3.3: C5.2 R1.2 U4.2 U4.4 X4.3 X6.1 | length 74.3
  Top Layer w0.5: v1(127.36,35.84) 129.6,33.6 159.36,33.6 162.59,36.83 X6.1
  Bottom Layer w0.5: U4.2 U4.4 130.58,52.42 R1.2 ; v1(127.36,35.84) 130.52,39 X4.3 130.52,49.4 R1.2 ; C5.2 128.95,50.79 R1.2
VCC5: BZ1.1 C4.2 C6.2 C8.2 C9.2 C18.1 C20.2 L1.1 R11.1 R14.2 U2.16 U3.8 U4.3 X3.5 X4.1 | length 93.8
  Top Layer w0.5: v1(91.2,50.24) v1(98.24,50.24)
  Bottom Layer w0.5: C6.2 84.64,46.25 U2.16 85.625,47.05 C8.2 88.65,47.05 91.2,49.6 v1(91.2,50.24) ; X3.5 98.56,57.68 98.56,52.335 U3.8 96.785,50.24 v1(98.24,50.24) 103.68,50.24 ; C4.2 103.67,50.23 103.68,50.24 ; R11.1 105.28,50.56 105.6,50.24 ; R14.2 111.68,50.24 ; C20.2 113.6,50.24 ; C9.2 124.78,60.17 U4.3 ; X4.1 121.28,46.08 C18.1 L1.1 ; BZ1.1 138.61,59.2 126,59.2 U4.3 ; 103.68,50.24 105.6,50.24 ; 105.6,50.24 111.68,50.24 ; 111.68,50.24 113.6,50.24 ; 113.6,50.24 115.84,50.24 117.46,51.86 L1.1 ; L1.1 119.04,53.76 123.26,57.98 U4.3
VCC24: C22.2 R13.1 U7.6 X1.1 X3.1 | length 29.9
  Bottom Layer w0.508: R13.1 104.965,54.725 U7.6
  Bottom Layer w0.75: X1.1 89.6,55.85 X3.1 89.6,60.16 90.24,60.8 101.44,60.8 102.08,60.16 ; C22.2 102.4,59.84 102.08,60.16 ; R13.1 103.36,54.08 102.72,54.72 102.72,55.68 102.08,56.32 102.08,60.16
pads on no net: BZ1.0 HL1.11 HL1.12 HL1.13 HL1.14 HL1.M U1.1 U1.2 U1.3 U1.7 U2.11 U2.12 U2.13 U2.14 U5.2 U5.3 U6.14 U6.22

## Polygon pours and split planes (outlines as drawn)
GND on Bottom Layer "Top Layer-No Net" (solid, pour order 6): 25.6,60.16 26.88,61.44 172.8,61.44 174.08,60.16 174.08,26.88 172.8,25.6 26.88,25.6 25.6,26.88
GND on Top Layer "Top Layer-No Net" (solid, pour order 8): 25.6,60.16 26.88,61.44 172.8,61.44 174.08,60.16 174.08,26.88 172.8,25.6 26.88,25.6 25.6,26.88

## Keep-outs
Keep-Out Layer:
  lines w2: 24,24 24,63.04 175.68,63.04 175.68,24.32 24,24.32

## Silkscreen, mask and mechanical layers (free items; w line width, h text height)
Top Overlay:
  lines w0.254: 25,25 176,25 176,62 25,62 25,25
  text "A" at 28.16,54.72 h5
  text "LCD" at 54.4,32.64 h1.52
  text "PCB v1.0" at 50.73,30.265 h1.52
  text "SCH v1.0" at 50.73,28.025 h1.52
Bottom Overlay:
  text "+" at 90.24,50.56 h1.52
  text "Mo" at 91.84,46.4 h1.5 r90
  text "5V" at 126.08,44.16 h1.1 r90
  text "VCC" at 128.64,44.16 h1.1 r90
  text "3.3V" at 131.2,44.16 h1.1 r90
  text "Mi" at 95.04,43.2 h1.5
  text "C" at 95.04,40.96 h1.5
  text "Res" at 96.32,29.12 h1.5

## Text inside footprints (layer, text, board x,y; h text height)
BZ1: Bottom Overlay "+" at 137.58,58.98 h1.1
X5: Bottom Overlay "1" at 73.92,48.32 h1.1 r90
X6: Bottom Overlay "1" at 168.402,34.29 h1.1 r270; Bottom Overlay "2" at 170.942,34.29 h1.1 r270